# EAGLE board DashDial (EAGLE 9.6.2)
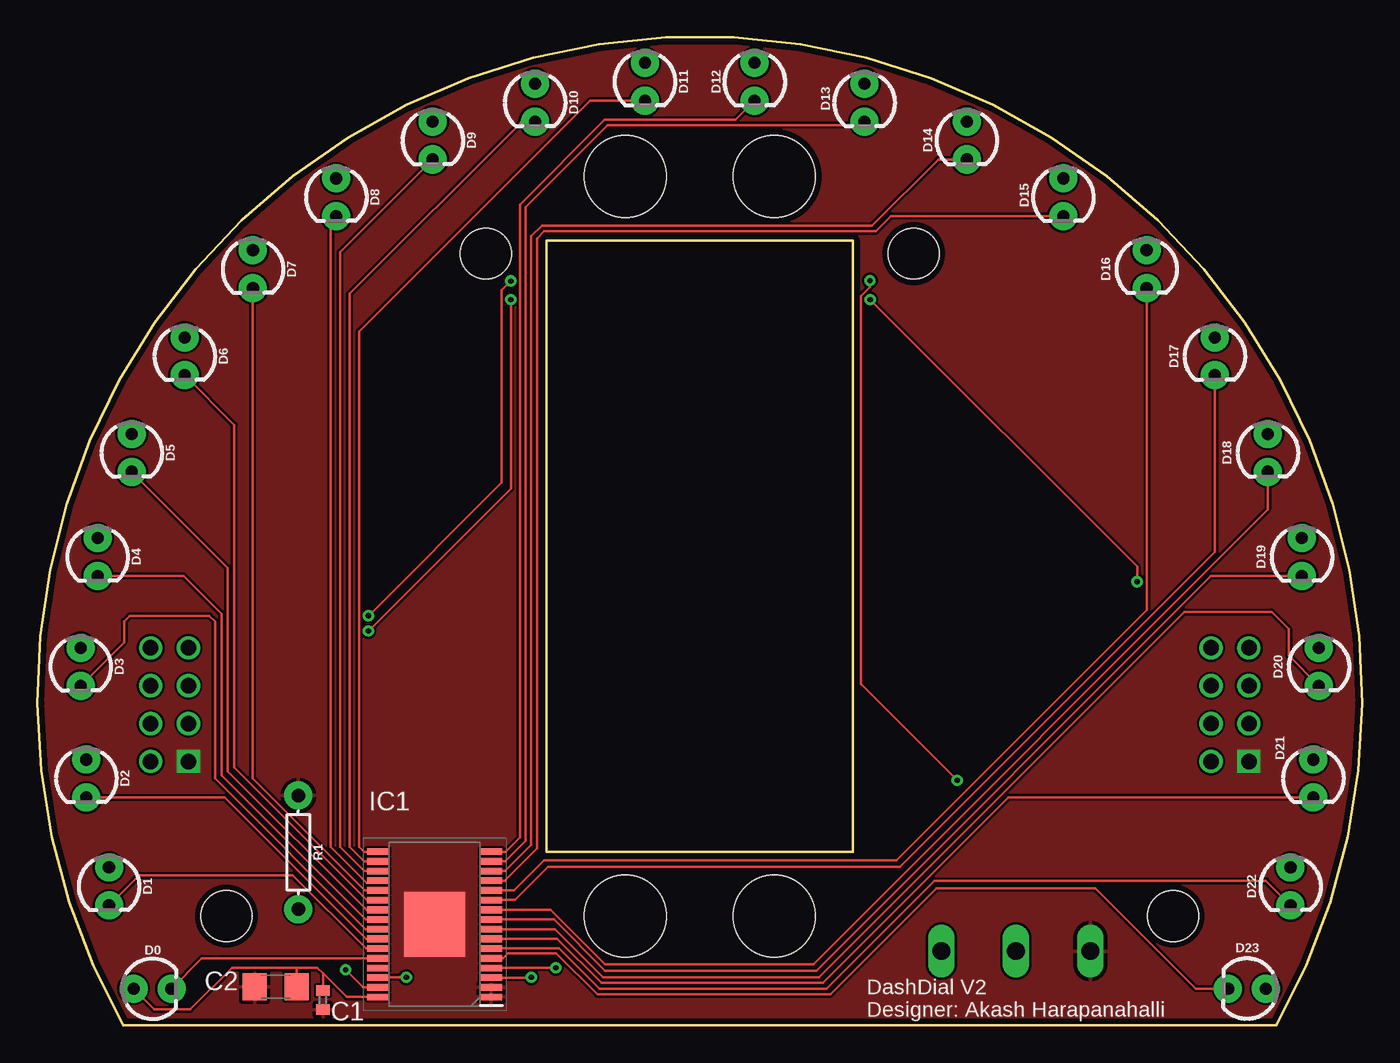
[diagram p0: board, top side]
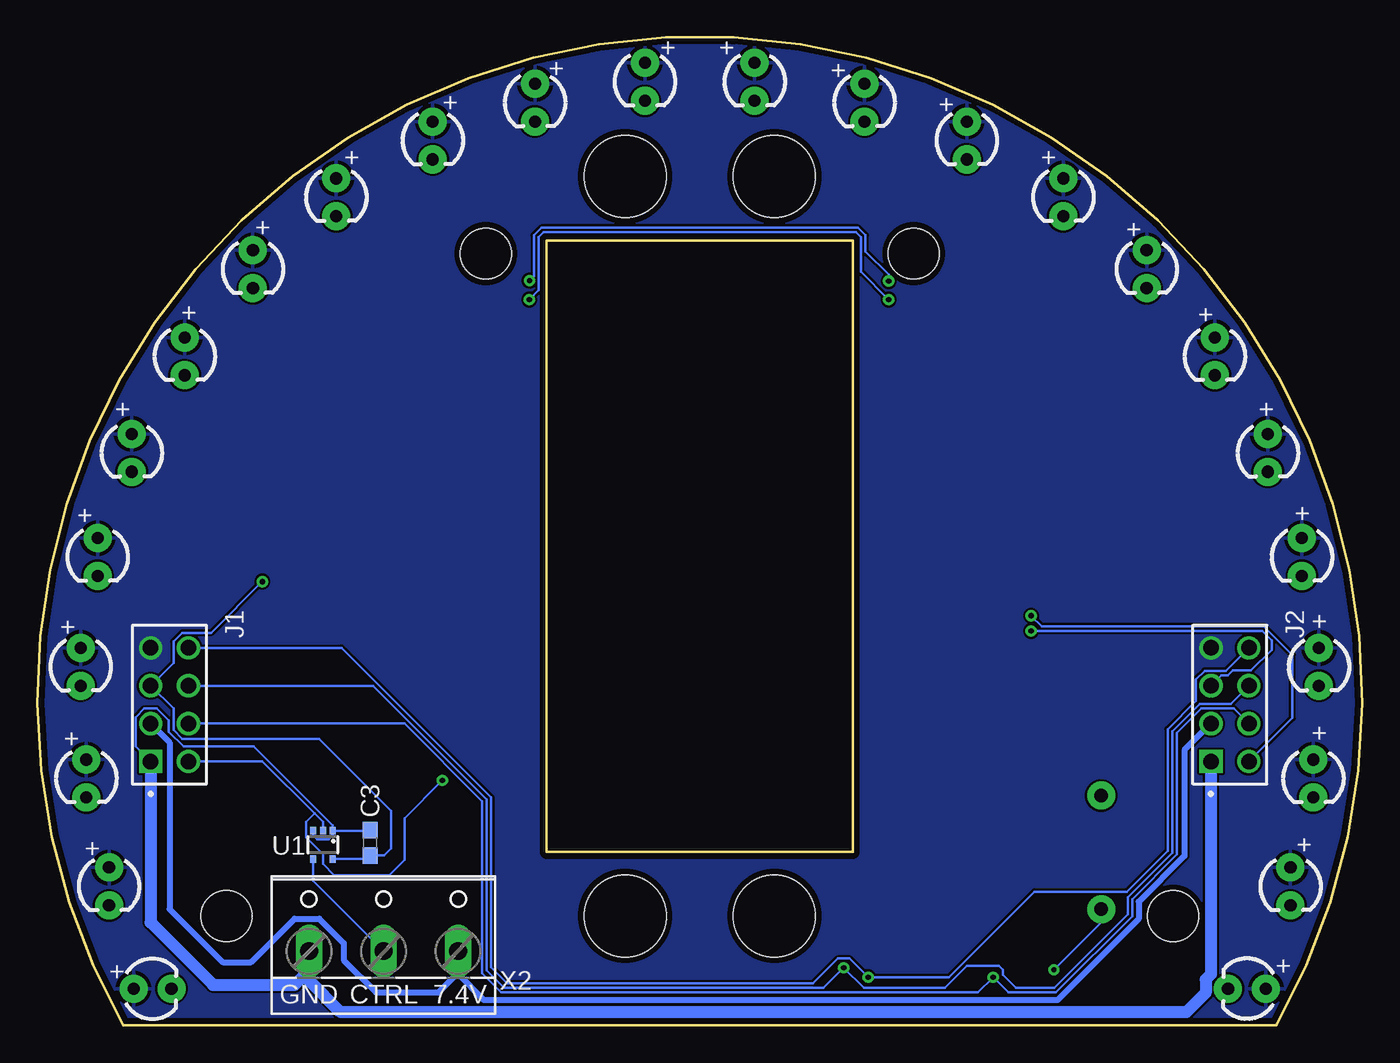
[diagram p1: board, bottom side, seen from below]

Size 88.87 x 66.28 mm. Coordinates in mm from the lower left corner, seen from the top.
Outline: 5.77,0 arc-239 83.09,0 5.77,0
Outline: 34.17,11.63 34.17,52.65 54.7,52.65 54.7,11.63 34.17,11.63
Copper layers (1*16): Top 0.035mm / dielectric 1.5mm / Bottom 0.035mm
Design rules "default *": minimum track width 6mil, minimum drill 0.35mm, track to track 6mil, track to pad 6mil, pad to pad 6mil, via to via 6mil, smd to smd 6mil, copper to edge 0.4mm, drill to drill 6mil, minimum pad ring 10mil, minimum via ring 8mil, stop-mask expansion 4mil, vias tented up to drill 0mil, thermal gap 10mil
Holes 5.51 mm at 39.43,56.95 49.44,56.95 39.43,7.34 49.44,7.34
Holes 3.4 mm at 12.68,7.34 30.08,51.77 58.78,51.77 76.18,7.34

## Footprints (pad centres in the part's own frame; a part is rotated, then mirrored left to right if it is on the bottom)
C0402 = smd 0.7 x 0.9: 1 -0.65,0; 2 0.65,0
C1206 = smd 1.6 x 1.8: 1 -1.4,0; 2 1.4,0
0603 = smd 1.1 x 1: 1 -0.85,0; 2 0.85,0
LED_3MM = drill 0.813 pad 1.88: A -1.27,0; K 1.27,0
SOP65P810X120-33N = smd 1.475 x 0.45: 1 -3.788,4.875; 2 -3.788,4.225; 3 -3.788,3.575; 4 -3.788,2.925; 5 -3.788,2.275; 6 -3.788,1.625; 7 -3.788,0.975; 8 -3.788,0.325; 9 -3.788,-0.325; 10 -3.788,-0.975; 11 -3.788,-1.625; 12 -3.788,-2.275; 13 -3.788,-2.925; 14 -3.788,-3.575; 15 -3.788,-4.225; 16 -3.788,-4.875; 17 3.788,-4.875; 18 3.788,-4.225; 19 3.788,-3.575; 20 3.788,-2.925; 21 3.788,-2.275; 22 3.788,-1.625; 23 3.788,-0.975; 24 3.788,-0.325; 25 3.788,0.325; 26 3.788,0.975; 27 3.788,1.625; 28 3.788,2.275; 29 3.788,2.925; 30 3.788,3.575; 31 3.788,4.225; 32 3.788,4.875 | smd 4.11 x 4.36: 33 0,0
SAMTEC_ESW-104-23-L-D = drill 1.04 pad 1.39 square: 01 0,0 | drill 1.04 pad 1.39: 02 0,2.54; 03 -2.54,0; 04 -2.54,2.54; 05 -5.08,0; 06 -5.08,2.54; 07 -7.62,0; 08 -7.62,2.54
AXIAL-0.3 = drill 0.9 pad 1.88: P$1 -3.81,0; P$2 3.81,0
SOT353 = smd 0.4 x 0.5: 1 -0.65,-0.95; 2 0,-0.95; 3 0.65,-0.95; 4 0.65,0.95; 5 -0.65,0.95
W237-103 = drill 1.194 long: 1 -5,-1.29; 2 0,-1.29; 3 5,-1.29

## Placement (x,y rotation side)
C1  0.1uF  [C0402]  19.16,1.7 90 top
C2  100uF  [C1206]  15.99,2.59 0 top
C3  0.1uF  [0603]  66.53,12.24 90 bottom
D0  [LED_3MM]  7.73,2.46 0 top
D1  [LED_3MM]  4.81,9.32 270 top
D2  [LED_3MM]  3.29,16.56 270 top
D3  [LED_3MM]  2.9,24.05 270 top
D4  [LED_3MM]  4.05,31.42 270 top
D5  [LED_3MM]  6.33,38.4 270 top
D6  [LED_3MM]  9.89,44.88 270 top
D7  [LED_3MM]  14.46,50.72 270 top
D8  [LED_3MM]  20.05,55.55 270 top
D9  [LED_3MM]  26.53,59.36 270 top
D10  [LED_3MM]  33.38,61.9 270 top
D11  [LED_3MM]  40.75,63.3 270 top
D12  [LED_3MM]  48.12,63.3 270 top
D13  [LED_3MM]  55.48,61.9 270 top
D14  [LED_3MM]  62.34,59.36 270 top
D15  [LED_3MM]  68.82,55.55 270 top
D16  [LED_3MM]  74.41,50.72 270 top
D17  [LED_3MM]  78.98,44.88 270 top
D18  [LED_3MM]  82.53,38.4 270 top
D19  [LED_3MM]  84.82,31.42 270 top
D20  [LED_3MM]  85.96,24.05 270 top
D21  [LED_3MM]  85.58,16.56 270 top
D22  [LED_3MM]  84.06,9.32 270 top
D23  [LED_3MM]  81.14,2.46 180 top
IC1  TLC5947DAPR  [SOP65P810X120-33N]  26.65,6.78 180 top
J1  ESW-104-23-L-D  [SAMTEC_ESW-104-23-L-D]  81.26,17.7 270 bottom
J2  ESW-104-23-L-D  [SAMTEC_ESW-104-23-L-D]  10.14,17.7 270 bottom
R1  3k  [AXIAL-0.3]  17.51,11.61 270 top
U1  LOGIC SHIFTER  [SOT353]  69.71,12.12 180 bottom
X2  SERVO  [W237-103]  65.64,6.27 0 bottom

## Library data of the parts
C1 C2 = rcl; SPICEPREFIX: C
C3 = SparkFun-Capacitors; PROD_ID: CAP-00810
D0 D1-D23 = SparkFun-LED; PROD_ID: DIO-08794
IC1 = TLC5947DAPR; ARROW_PART_NUMBER: TLC5947DAPR; ARROW_PRICE-STOCK: https://www.arrow.com/en/products/tlc5947dapr/texas-instruments; DESCRIPTION: 24-Channel, 12-Bit PWM LED Driver with Internal Oscillator; HEIGHT: 1.2mm; MANUFACTURER_NAME: Texas Instruments; MANUFACTURER_PART_NUMBER: TLC5947DAPR; MOUSER_PART_NUMBER: 595-TLC5947DAPR; MOUSER_PRICE-STOCK: https://www.mouser.co.uk/ProductDetail/Texas-Instruments/TLC5947DAPR?qs=Vj8prLbzEFAFq%2FnrzWbKjQ%3D%3D
J1 J2 = ESW-104-23-L-D; MANUFACTURER: Samtec Inc.; PARTREV: R; STANDARD: Manufacturer Recommendations
R1 = SparkFun-Resistors
U1 = MC74VHC1GT125; AVAILABILITY: Unavailable; DESCRIPTION: Buffer, Non-Inverting 1 Element 1 Bit per Element 3-State Output SC-88A (SC-70-5/SOT-353); MF: ON Semiconductor; MP: MC74VHC1GT125; PACKAGE: SOT-353 ON Semiconductor; PRICE: None
X2 = con-wago-500; MPN: 237-103; OC_FARNELL: unknown; OC_NEWARK: 18M7116

## Nets
3.3V: C1.2 C2.2 D0.A D1.A D2.A D3.A D4.A D5.A D6.A D7.A D8.A D9.A D10.A D11.A D12.A D13.A D14.A D15.A D16.A D17.A D18.A D19.A D20.A D21.A D22.A D23.A IC1.32 J1.07 J2.07
5V: C3.1 J1.05 J2.05 U1.5
7.4V: J1.03 J2.03 X2.3
GND: C1.1 C2.1 C3.2 IC1.1 IC1.2 IC1.33 J1.01 J2.01 R1.P$1 U1.1 U1.3 X2.1
LAT: IC1.30 J1.04 J2.04
N$1: U1.4 X2.2
N$32: IC1.31 R1.P$2
OUT0: D23.K IC1.5
OUT1: D22.K IC1.6
OUT2: D21.K IC1.7
OUT3: D20.K IC1.8
OUT4: D19.K IC1.9
OUT5: D18.K IC1.10
OUT6: D17.K IC1.11
OUT7: D16.K IC1.12
OUT8: D15.K IC1.13
OUT9: D14.K IC1.14
OUT10: D13.K IC1.15
OUT11: D12.K IC1.16
OUT12: D11.K IC1.17
OUT13: D10.K IC1.18
OUT14: D9.K IC1.19
OUT15: D8.K IC1.20
OUT16: D7.K IC1.21
OUT17: D6.K IC1.22
OUT18: D5.K IC1.23
OUT19: D4.K IC1.24
OUT20: D3.K IC1.25
OUT21: D2.K IC1.26
OUT22: D1.K IC1.27
OUT23: D0.K IC1.28
SCLK: IC1.3 J1.08 J2.08
SERVO_CTRL: J1.02 J2.02 U1.2
SIN: IC1.4 J1.06 J2.06

## Tracks (layer width: path | path; a pad name or v marks a point on that pad's centre or on a via)
3.3V
  Top 0.152: D0.A 7.86,1.07 10.27,1.07 13.06,3.86 17.38,3.86 | 17.38,3.86 18.78,3.86 19.16,3.48 | 19.16,3.48 C1.2 | 19.16,3.48 20.73,1.91 IC1.32 | C2.2 17.39,3.86 17.38,3.86
  pour Bottom: -10.05,68.63 -10.05,9.45 4.17,-4.78 86.98,-4.78 89.9,-1.85 101.84,10.08 101.84,69.27 101.2,68.63
  pour Bottom (no thermals): 9.13,26.34 9.13,24.31 11.16,24.31 11.16,26.34
  pour Bottom (no thermals): 80.25,26.34 80.25,24.31 82.28,24.31 82.28,26.34
5V  (via drill 0.35)
  Top 0.152: v22.21,26.47 31.76,36.02 v31.76,48.69 | v55.86,48.69 73.77,30.78 v73.77,29.77
  Bottom 0.152: U1.5 66.76,11.17 C3.1 65.6,11.39 65.13,11.86 65.13,14.4 69.96,19.23 79.13,19.23 79.73,19.83 79.73,21.25 J1.05 79.73,24.31 79.73,25.74 79.14,26.33 77.21,26.33 v73.77,29.77 | J2.05 9.44,23.49 9.01,23.49 8.7,23.8 7.48,23.8 6.08,25.2 6.08,25.83 6.71,26.47 v22.21,26.47 | v31.76,48.69 33.62,50.55 33.62,52.88 33.94,53.21 54.92,53.21 55.25,52.88 55.25,49.31 v55.86,48.69
7.4V
  Bottom 0.406: J2.03 11.92,18.47 11.92,11.36 14.99,8.3 14.99,7.14 20.43,1.7 58.91,1.7 60.69,3.48 | 60.69,3.48 60.69,4.94 X2.3 | J1.03 79.99,18.97 79.99,7.8 76.44,4.24 74.53,4.24 71.61,7.16 69.96,7.16 68.31,5.51 68.31,4.37 66.15,2.21 61.96,2.21 60.69,3.48
GND
  Bottom 0.152: U1.1 66.56,13.07 C3.2 | U1.1 69.06,12.77 69.33,12.5 70.09,12.5 70.36,12.77 U1.3 | J1.01 82.27,18.71 82.27,20.66 81.68,21.25 80.85,21.25 80.04,20.44 80.04,19.7 79.05,18.71 74.35,18.71 69.06,13.42 U1.1
  Bottom 0.813: J2.01 10.14,3.44 10.5,3.08 10.5,2.18 11.79,0.88 68.51,0.88 70.64,3.02 X2.1 70.64,3.69 71.61,2.72 77.07,2.72 81.26,6.91 J1.01
  pour Top (rank 2): -13.86,71.3 -13.86,8.94 3.16,-8.08 88.76,-8.08 105.52,8.69 105.52,71.81 105.01,71.3
  pour Top (no thermals): 24.37,10.08 28.94,10.08 28.94,3.99 24.37,3.99
  pour Top (no thermals): 80.25,18.59 80.25,16.69 82.28,16.69 82.28,18.72 80.25,18.72
  pour Top (no thermals): 9.13,18.59 9.13,16.69 11.16,16.69 11.16,18.72 9.13,18.72
LAT  (via drill 0.35)
  Top 0.152: v24.75,3.23 22.88,3.23 IC1.30
  Bottom 0.152: J1.04 64.25,20.24 59.04,15.04 59.04,3.48 57.77,2.21 25.76,2.21 v24.75,3.23 23.73,2.21 20.53,2.21 15.42,7.32 15.42,8.47 12.43,11.46 12.43,19.61 10.78,21.26 8.62,21.26 J2.04
N$1
  Bottom 0.152: U1.4 70.36,9.7 X2.2
N$32  (via drill 0.35)
  Top 0.152: IC1.31 21.86,2.56 v20.68,3.73
  Bottom 0.152: v20.68,3.73 17.51,6.91 R1.P$2
OUT0
  Top 0.152: IC1.5 31.24,4.51 31.58,4.85 34.81,4.85 37.58,2.08 53.2,2.08 60.31,9.19 70.98,9.19 77.71,2.46 D23.K
OUT1
  Top 0.152: IC1.6 35.01,5.16 37.7,2.46 52.94,2.46 60.18,9.7 82.41,9.7 D22.K
OUT2
  Top 0.152: IC1.7 34.87,5.81 37.83,2.84 52.69,2.84 65.13,15.29 D21.K
OUT3
  Top 0.152: IC1.8 34.73,6.46 37.96,3.23 52.43,3.23 76.95,27.74 82.79,27.74 83.93,26.59 83.93,24.82 D20.K
OUT4
  Top 0.152: IC1.9 34.66,7.11 38.09,3.68 52.25,3.68 78.72,30.15 D19.K
OUT5
  Top 0.152: IC1.10 34.44,7.76 38.09,4.11 52.05,4.11 82.53,34.59 D18.K
OUT6
  Top 0.152: IC1.11 30.47,8.43 32.04,8.43 34.25,10.65 57.88,10.65 78.98,31.75 D17.K
OUT7
  Top 0.152: IC1.12 30.45,9.07 31.99,9.07 34,11.08 57.62,11.08 74.41,27.86 D16.K
OUT8
  Top 0.152: IC1.13 31.36,9.71 33.51,11.86 33.51,52.77 34,53.26 56.24,53.26 57.26,54.28 D15.K
OUT9
  Top 0.152: IC1.14 31.37,10.36 33.13,12.12 33.13,52.93 33.84,53.64 55.99,53.64 60.44,58.09 D14.K
OUT10
  Top 0.152: IC1.15 31.39,11.01 32.75,12.37 32.75,54.89 38.24,60.38 55.23,60.38 D13.K
OUT11
  Top 0.152: IC1.16 31.4,11.66 32.37,12.62 32.37,55.06 38.06,60.76 46.85,60.76 D12.K
OUT12
  Top 0.152: IC1.17 21.91,11.66 21.57,11.99 21.57,46.53 37.07,62.03 D11.K
OUT13
  Top 0.152: IC1.18 21.92,11.01 20.94,11.99 20.94,49.07 32.37,60.5 32.5,60.63 D10.K
OUT14
  Top 0.152: IC1.19 21.94,10.36 20.3,11.99 20.3,51.87 D9.K
OUT15
  Top 0.152: IC1.20 22.74,9.58 22.08,9.58 19.67,11.99 19.67,53.9 D8.K
OUT16
  Top 0.152: IC1.21 21.97,9.06 14.46,16.56 D7.K
OUT17
  Top 0.152: IC1.22 22.11,8.41 13.22,17.3 13.22,40.28 D6.K
OUT18
  Top 0.152: IC1.23 22.08,7.76 22,7.84 12.79,17.05 12.79,30.68 D5.K
OUT19
  Top 0.152: IC1.24 22.01,7.11 12.35,16.76 12.35,27.61 9.81,30.15 D4.K
OUT20
  Top 0.152: IC1.25 22.03,6.46 11.92,16.56 11.92,27.1 11.54,27.48 6.21,27.48 5.83,27.1 5.83,25.7 D3.K
OUT21
  Top 0.152: IC1.26 22.04,5.81 12.56,15.29 D2.K
OUT22
  Top 0.152: IC1.27 22.06,5.16 17.13,10.08 6.84,10.08 D1.K
OUT23
  Top 0.152: IC1.28 11.04,4.51 D0.K
SCLK  (via drill 0.35)
  Top 0.152: v33.13,3.23 33.11,3.21 IC1.3
  Bottom 0.152: J1.08 68.46,25.32 58.43,15.29 58.43,3.89 57.36,2.82 36.84,2.82 35.16,4.5 34.4,4.5 v33.13,3.23 27.72,3.23 21.98,8.97 15.79,8.97 13.04,11.72 13.04,19.86 11.15,21.75 11.15,22.36 11.15,22.37 11.15,23.2 10.56,23.79 9.13,23.79 J2.08
SERVO_CTRL  (via drill 0.35)
  Top 0.152: v22.21,27.48 31.15,36.43 31.15,49.33 v31.76,49.94 | v55.85,49.96 55.85,49.54 55.25,48.93 55.25,22.89 v61.71,16.43
  Bottom 0.152: J1.02 73.77,17.7 70.28,14.21 | 70.28,14.21 69.71,13.64 U1.2 | J2.02 4.68,20.62 4.68,24.87 6.59,26.77 21.5,26.77 v22.21,27.48 | v31.76,49.94 31.76,50.36 33.31,51.92 33.31,53.01 33.82,53.51 34.65,53.51 55.05,53.51 55.55,53.01 55.55,50.26 v55.85,49.96 | v61.71,16.43 64.25,13.89 64.25,11.1 65.26,10.08 68.94,10.08 69.71,10.85 69.71,11.48 70.85,12.62 70.85,13.64 70.28,14.21
SIN  (via drill 0.35)
  Top 0.152: v34.78,3.86 IC1.4
  Bottom 0.152: J1.06 66.35,22.78 58.73,15.16 58.73,3.68 57.57,2.51 36.13,2.51 v34.78,3.86 33.44,2.51 28,2.51 26.53,3.99 24.37,3.99 24.11,3.73 24.11,3.4 23.22,2.51 20.66,2.51 15.73,7.45 15.73,8.6 12.73,11.59 12.73,19.73 10.9,21.56 8.82,21.56 J2.06

## Text on the board
tPlace: DashDial V2 / Designer: Akash Harapanahalli
bNames: + | + | + | + | + | + | + | + | + | + | + | + | + | + | + | + | + | + | + | + | + | + | + | + | 7.4V | CTRL | GND